# Altium PCB DIPSY_UL1K16_LED5.PcbDoc
Units mm, origin at the board's own origin, x right, y up, seen from the top; angles counter-clockwise.
Board outline 8.59 x 5.5 mm, 2 copper layers (L 01 (Top), L 04 (Bot)), stack 0.171 mm thick; 4 components, 7 nets, 30 pads, 2 vias.
Unrouted connection lines stored in the file: 16.
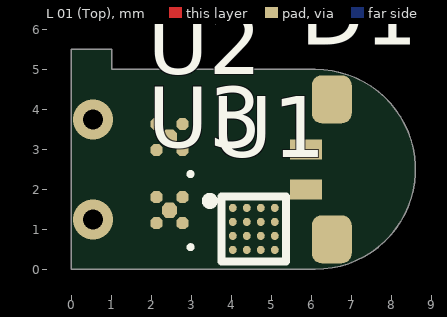
[diagram p0: L 01 (Top) view]
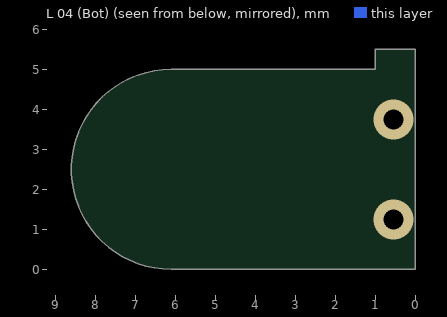
[diagram p1: L 04 (Bot) view, seen from below]

## Layer stack, top to bottom
Top Solder: solder mask 0.0102, Solder Resist, Dk 3.5
L 01 (Top): signal copper 0.054
Dielectric1: core 0.063, FR-4, Dk 4.2
L 04 (Bot): signal copper 0.054
Bottom Solder: solder mask 0.0102, Solder Resist, Dk 3.5

## Board outline
0,0 0,5.496 1.004,5.496 1.004,5.004 6.098,5.004 6.098,5 cw(c6.098,2.5) 6.098,0

## Design rules (kind name [scope] priority, off if disabled: settings)
Clearance Clearance_DiffPair [(InDifferentialPairClass('All Differential Pairs')) vs (InPolygon)] p1: gap=0.4
Clearance Clearance_PolyToPoly [InPoly vs InPoly] p2: gap=0.3
Clearance Clearance_Polygon [(InPolygon)] p3: gap=0.15
Clearance [All] p4: gap=0.05
ComponentClearance ComponentClearance_logo [(HasFootprint('LOGO PRINT') or HasFootprint('FIDU-DOT - small'))] p1: gap=-0.05 collisioncheckmode=3 verticalgap=-0.1 showdistances=FALSE
ComponentClearance [All] p2: gap=-0.05 collisioncheckmode=3 verticalgap=0.254 showdistances=FALSE
DiffPairsRouting [All] p1: maxlimit=0.145 minlimit=0.11 mostfreqgap=0.145 toplayer_minwidth=0.11 toplayer_maxwidth=0.381 toplayer_prefwidth=0.381 bottomlayer_minwidth=0.11 bottomlayer_maxwidth=0.381 bottomlayer_prefwidth=0.381 maxuncoupledlength=47.5
FabricationTestPointUsage TestPointUsage [All] p1: valid=0 allowmultiple=FALSE
FabricationTestpoint Testpoint [All] p1: side=3 testpointundercomponent=TRUE minsize=1.016 maxsize=2.54 preferedsize=1.524 minholesize=0 maxholesize=1.016 preferedholesize=0.813 testpointgrid=0.025 allowsidetop=TRUE allowsidebottom=TRUE usegrid=TRUE gridtolerance=0
HoleSize [All] p1: absolutevalues=TRUE maxlimit=5 minlimit=0.15 maxpercent=80.000 minpercent=20.000
MinimumAnnularRing [All] p1: minimumring=0.074
PlaneClearance [All] p1: clearance=0.4
PlaneConnect [All] p1: planeconnectstyle=Direct reliefexpansion=0.508 reliefentries=4 reliefconductorwidth=0.254 reliefairgap=0.254
PolygonConnect PolygonConnect_5 [InPadClass('pad') or IsVia] p1: connectstyle=Direct reliefconductorwidth=0.254 reliefentries=4 polygonreliefangle="90 Angle" airgapwidth=0.254
PolygonConnect PolygonConnect_4 [HasFootprint('MHole3_2mm')] p2: connectstyle=Direct reliefconductorwidth=0.254 reliefentries=4 polygonreliefangle="90 Angle" airgapwidth=0.254
PolygonConnect PolygonConnect_3 [(InComponentClass('All Components'))] p3: connectstyle=Relief reliefconductorwidth=0.15 reliefentries=4 polygonreliefangle="90 Angle" airgapwidth=0.2
RoutingCorners [All] p1: cornerstyle=Round minsetback=2 maxsetback=2
RoutingVias [All] p1: holewidth=0.3 width=0.6 viastyle="Through Hole" minholewidth=0.15 minwidth=0.3 maxholewidth=1 maxwidth=3
SMDNeckDown [All] p1: percent=80.000
SilkToSilkClearance [All] p1: silktosilkclearance=0.1
SilkToSolderMaskClearance SilkscreenOverComponentPads [IsPad] p1: minsilkscreentomaskgap=0.1 clearancetoexposedcopper=TRUE
SolderMaskExpansion SolderMaskExpansion_VIA [(IsVia)] p1: expansion=-0.125
SolderMaskExpansion [All] p2: expansion=0
UnpouredPolygon [All] p1: allowunpoured=FALSE
Width [All] p1: maxlimit=3 minlimit=0.05 preferedwidth=0.08 minimp=50.000000 maximp=50.000000 favimp=50.000000 checkconnectedcopper=TRUE
19 further rules are at their usual default settings.

## Components (designator, comment, footprint, x,y, rotation, side; value= is the part's Value field where it differs from the comment)
D1 "LTST-S310F2KT" LTST-S310F2KT 6.507,2.5 r0 top
U1 "ICE40UL1K-SWG16ITR" BGA16C35P4X4_140X140X49B21N 4.557,1.01 r0 top
U2 "LDO_1mm" DFN65P100X45-4N 2.45,3.306 r180 top
U3 "LDO_1mm" DFN65P100X45-4N 2.45,1.477 r180 top

## Footprints (in the part's own frame and the unit in brackets; to place one, negate y for a bottom-side part, rotate by r counter-clockwise, add the part's x,y. Pads: shape width x height; smd on the part's side, far side on the other; paste and mask are expansions set on the pad)
BGA16C35P4X4_140X140X49B21N [mm]
  round 0.2 smd: A1(-0.525,0.525) A2(-0.175,0.525) A3(0.175,0.525) A4(0.525,0.525) B1(-0.525,0.175) B2(-0.175,0.175) B3(0.175,0.175) B4(0.525,0.175) C1(-0.525,-0.175) C2(-0.175,-0.175) C3(0.175,-0.175) C4(0.525,-0.175) D1(-0.525,-0.525) D2(-0.175,-0.525) D3(0.175,-0.525) D4(0.525,-0.525)
  silkscreen extent -1.2,-0.81 0.81,0.81, body extent -0.7,-0.7 0.7,0.7, height 0.5
DFN65P100X45-4N [mm]
  oct 0.3x0.3 smd: 1(-0.325,0.325) 2(-0.325,-0.325) 3(0.325,-0.325) 4(0.325,0.325)
  oct 0.38x0.38 smd: 5(0,0)
  silkscreen extent -0.58,0.88 -0.48,0.97, body extent -0.53,-0.53 0.53,0.53, height 0.45
LTST-S310F2KT [mm]
  rect 0.8x0.5 smd: 1(-0.65,0.5) 2(-0.65,-0.5)
  rrect50% 1x1.2 smd: 3(0,-1.75) 4(0,1.75)
  body extent -0.25,-1.7 1.3,1.5, height 1

## Part data
U1: library part 26737

## Via types
v1: diameter 1, hole 0.5, L 01 (Top) to L 04 (Bot), 2 vias

## Nets (pads, with @x,y where several pads share a name; then routed paths per layer and width w, separated by ;. In a path a pad name is that pad's centre, name@x,y a point inside that pad or via, vN(x,y) a via of type N, cw(c..) or ccw(c..) an arc to the next point about the centre after c; other vN are vias at no path point)
GND: U1.A3 U1.B1 U2.2 U2.5 U3.2 U3.5
  other v1: 0.544,1.251
NetD1_1: D1.1 U1.A4
NetD1_2: D1.2 U1.B4
NetD1_3: D1.3 U1.C4
VCCINT: U1.D4 U3.1
VCCIO: U1.B3 U1.D3 U2.1
VIN: D1.4 U2.3 U2.4 U3.3 U3.4
pads on no net: U1.A1 U1.A2 U1.B2 U1.C1 U1.C2 U1.C3 U1.D1 U1.D2
copper on no net:
  other v1: 0.544,3.746

## Silkscreen, mask and mechanical layers (free items; w line width, h text height)
Mechanical 6:
  lines w0.01: 1.004,5.004 1.004,5.496 0,5.496 0,0 6.098,0 ccw(c6.098,2.5) 6.098,5 ; 1.005,5.004 6.098,5.004

## Dimensions
0,5.496 to 0,0 on Dimension
0,0 to 8.598,2.5 on Dimension
0.544,1.251 to 0,0 on Dimension
0.544,3.746 to 0.544,1.251 on Dimension
1.004,5.496 to 0,5.496 on Dimension